# Altium PCB Effects_PSU.PcbDoc
Units mm, origin at the board's own origin, x right, y up, seen from the top; angles counter-clockwise.
Board outline 54.55 x 87.45 mm, 2 copper layers (Top Layer, Bottom Layer); 21 components, 7 nets, 48 pads, 0 vias.
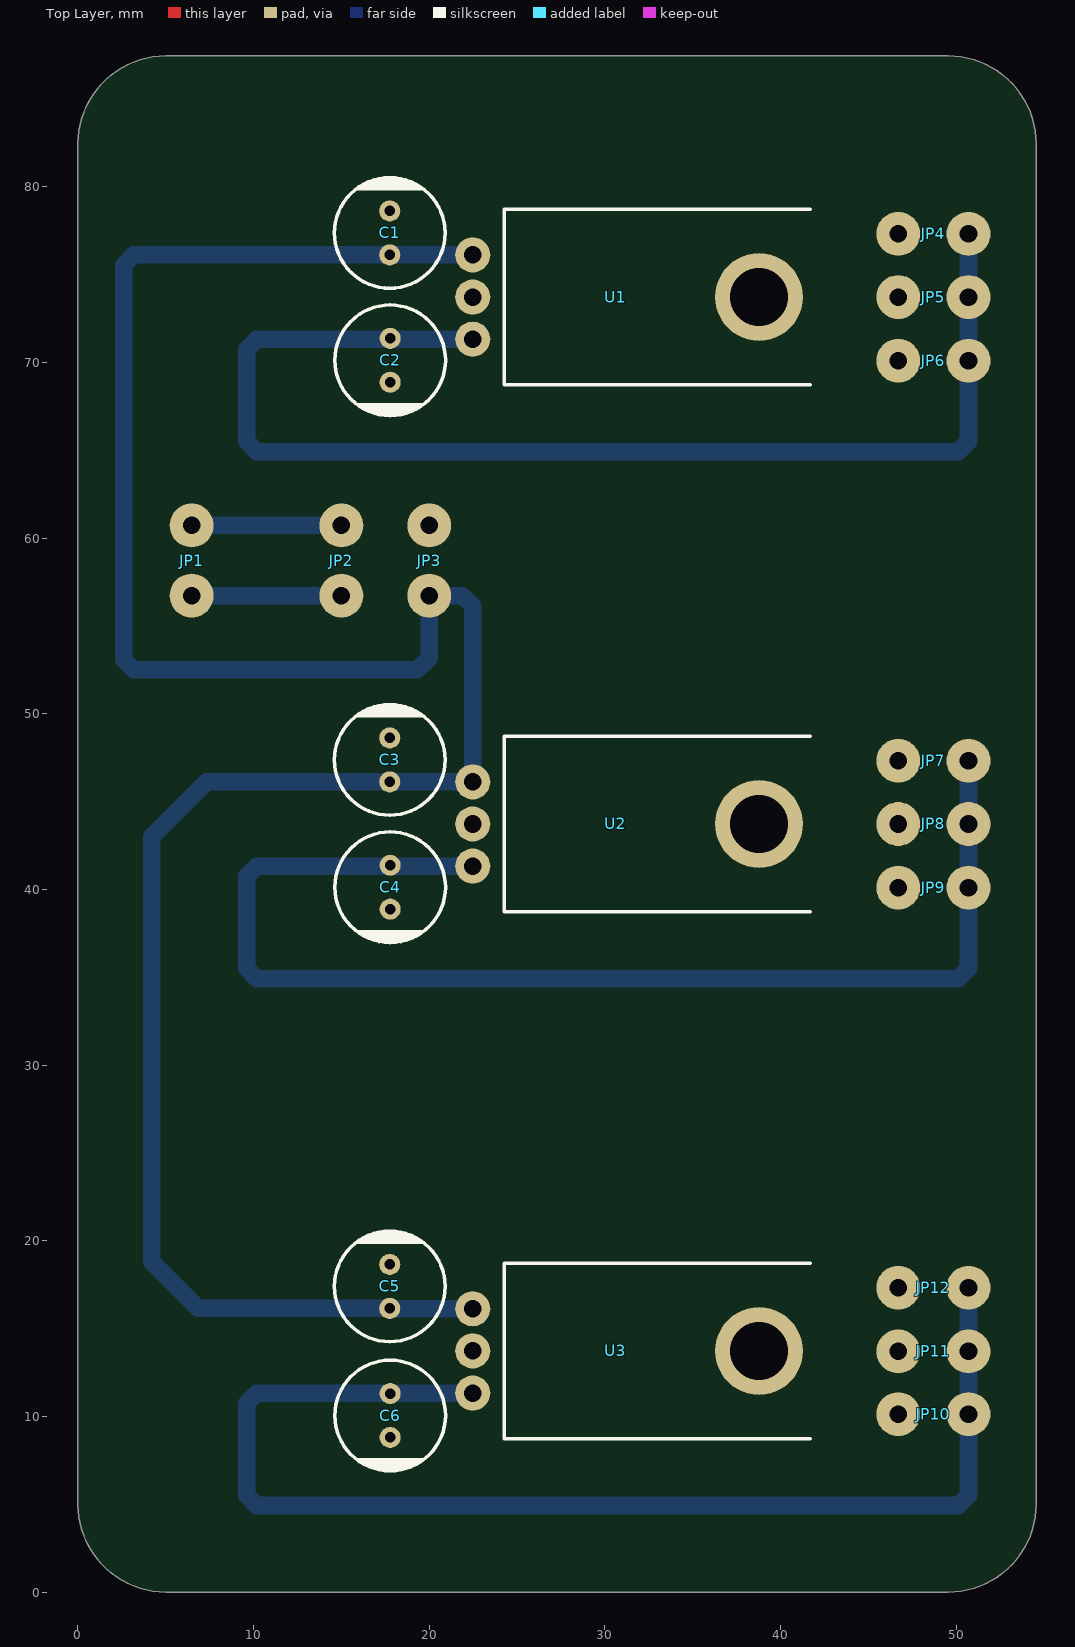
[diagram p0: Top Layer view]
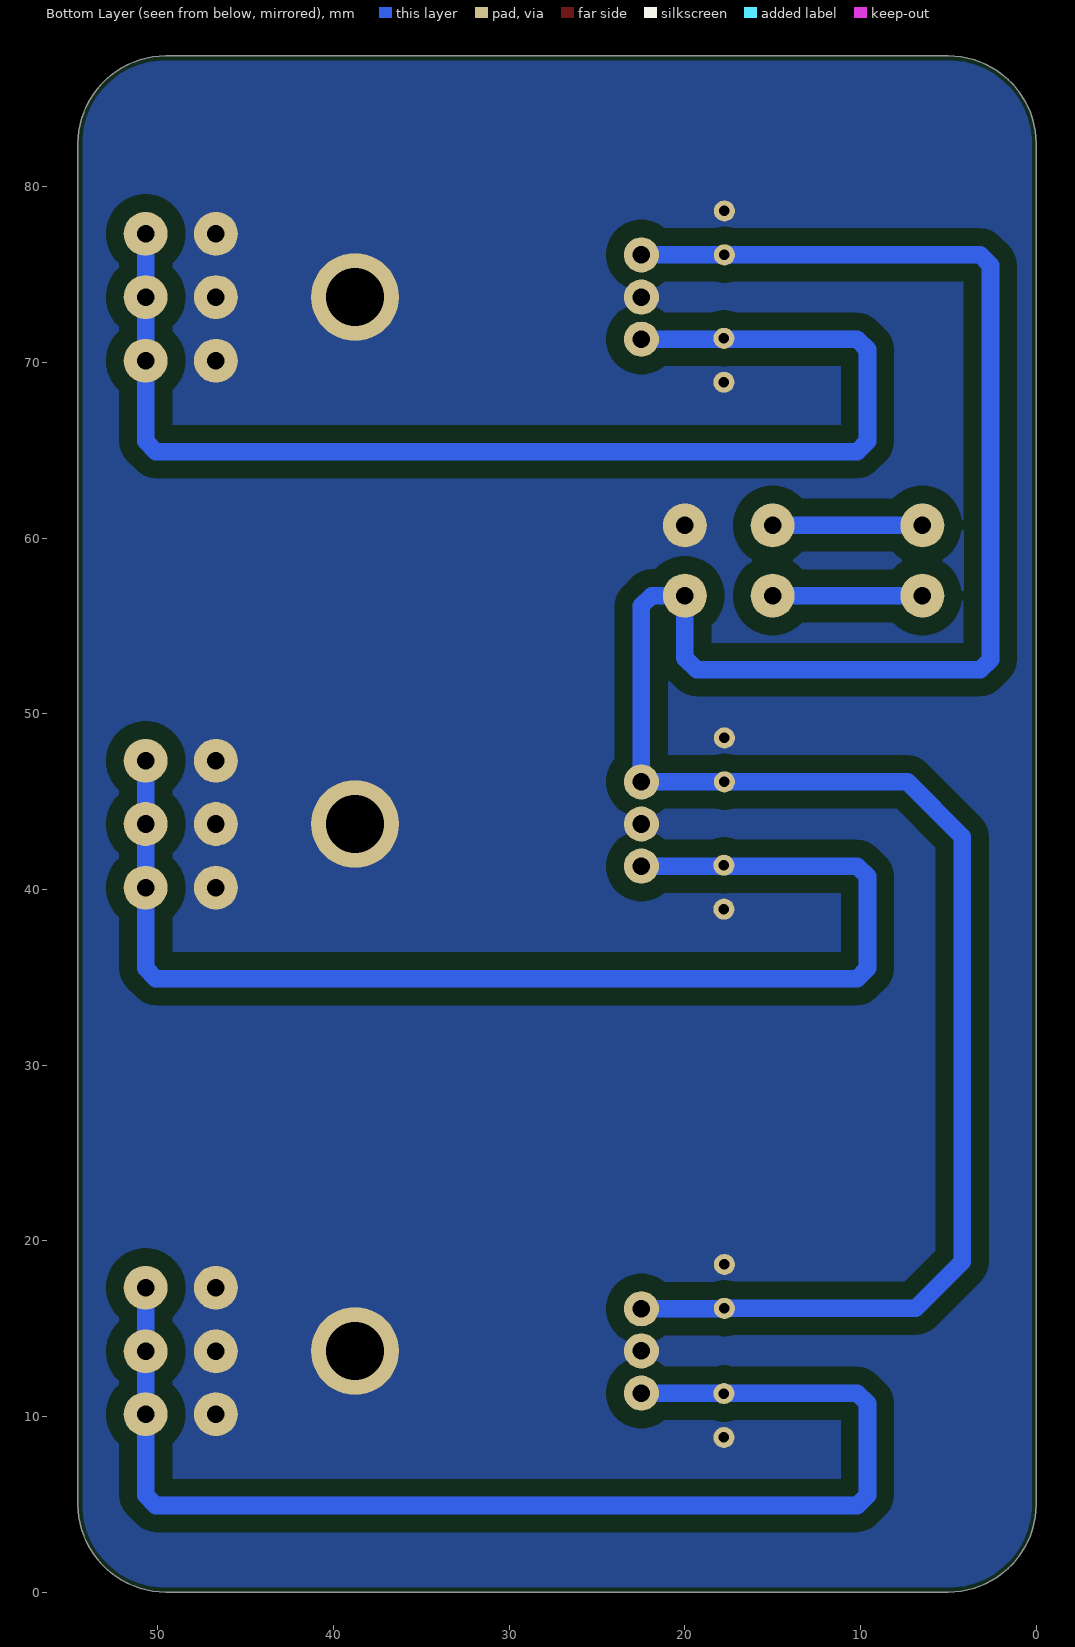
[diagram p1: Bottom Layer view, seen from below]

## Layer stack, top to bottom
Top Solder: solder mask 0.0102, Solder Resist, Dk 3.5
Top Layer: signal copper 0.0356
Dielectric 1: dielectric 0.32, FR-4, Dk 4.8
Bottom Layer: signal copper 0.0356
Bottom Solder: solder mask 0.0102, Solder Resist, Dk 3.5

## Board outline
5,0 cw(c5,5) 0,5 0,82.45 cw(c5,82.45) 5,87.45 49.55,87.45 cw(c49.55,82.45) 54.55,82.45 54.55,5 cw(c49.55,5) 49.55,0

## Design rules (kind name [scope] priority, off if disabled: settings)
BoardOutlineClearance [All] p1: gap=0.254 ignorepadtopadclearanceinfootprint=FALSE
Clearance [All] p1: gap=0.254 ignorepadtopadclearanceinfootprint=FALSE except(0: Arc-Hole Track-Hole SMDPad-Hole THPad-Hole Via-Hole Fill-Hole Poly-Hole Region-Hole Text-Hole; 1: Arc-Fill Arc-Poly Arc-Region Track-Fill Track-Poly Track-Region SMDPad-Fill SMDPad-Poly SMDPad-Region THPad-Fill THPad-Poly THPad-Region Via-Fill Via-Poly Via-Region Fill-Fill Fill-Poly Fill-Region Poly-Poly Poly-Region Region-Region)
ComponentClearance [All] p1: gap=0.15 collisioncheckmode=3 verticalgap=0.254 showdistances=FALSE
HoleSize [All] p1: absolutevalues=TRUE maxlimit=10 minlimit=0.025 maxpercent=80.000 minpercent=20.000
HoleToHoleClearance [All] p1: gap=0.15 allowstackedmicrovias=TRUE
MinimumSolderMaskSliver [All] p1: minsoldermaskwidth=0.15
PolygonConnect [All] p1: connectstyle=Direct reliefconductorwidth=0.254 reliefentries=4 polygonreliefangle="90 Angle" airgapwidth=0.254
RoutingVias [All] p1: holewidth=0.711 width=1.27 viastyle="Through Hole" minholewidth=0.711 minwidth=1.27 maxholewidth=0.711 maxwidth=1.27
SilkToSilkClearance [All] p1: silktosilkclearance=0.15
SilkToSolderMaskClearance [IsPad] p1: minsilkscreentomaskgap=0.15 clearancetoexposedcopper=TRUE
SolderMaskExpansion [All] p1: expansion=0.102 istentingtop=FALSE
Width [All] p1: maxlimit=1 minlimit=0.5 preferedwidth=1
24 further rules are at their usual default settings.

## Components (designator, comment, footprint, x,y, rotation, side; value= is the part's Value field where it differs from the comment)
C1 "100u 16V" "Capacitor 6.3mm" 17.75,77.375 r90 top
C2 "100u 16V" "Capacitor 6.3mm" 17.775,70.125 r270 top
C3 "100u 16V" "Capacitor 6.3mm" 17.75,47.375 r90 top
C4 "100u 16V" "Capacitor 6.3mm" 17.775,40.125 r270 top
C5 "100u 16V" "Capacitor 6.3mm" 17.75,17.4 r90 top
C6 "100u 16V" "Capacitor 6.3mm" 17.775,10.05 r270 top
JP1 "Mechanical 2pin 1mm" "2 PIN" 6.475,58.725 r90 top
JP2 "Mechanical 2pin 1mm" "2 PIN" 15,58.725 r90 top
JP3 "Mechanical 2pin 1mm" "2 PIN" 20,58.725 r90 top
JP4 "Mechanical 2pin 1mm" "2 PIN" 48.7,77.325 r0 top
JP5 "Mechanical 2pin 1mm" "2 PIN" 48.7,73.725 r180 top
JP6 "Mechanical 2pin 1mm" "2 PIN" 48.7,70.1 r180 top
JP7 "Mechanical 2pin 1mm" "2 PIN" 48.7,47.325 r0 top
JP8 "Mechanical 2pin 1mm" "2 PIN" 48.7,43.725 r180 top
JP9 "Mechanical 2pin 1mm" "2 PIN" 48.7,40.1 r180 top
JP10 "Mechanical 2pin 1mm" "2 PIN" 48.7,10.125 r0 top
JP11 "Mechanical 2pin 1mm" "2 PIN" 48.7,13.7 r180 top
JP12 "Mechanical 2pin 1mm" "2 PIN" 48.7,17.325 r180 top
U1 "7809" 78xx 22.275,73.725 r270 top
U2 "7809" 78xx 22.275,43.725 r270 top
U3 "7809" 78xx 22.275,13.725 r270 top

## Footprints (in the part's own frame and the unit in brackets; to place one, negate y for a bottom-side part, rotate by r counter-clockwise, add the part's x,y. Pads: shape width x height; smd on the part's side, far side on the other; paste and mask are expansions set on the pad)
"2 PIN" [mm]
  round 2.5 hole 1 unplated: 1(-2,0) 2(2,0)
78xx [mm]
  round 2 hole 1 unplated: 1(-2.4,0.2) 2(0,0.2) 3(2.4,0.2)
  round 5 hole 3.3 unplated: 2(0,16.5)
  silkscreen extent -5,2 5,19.43, body extent -5.08,0 5.08,19.49, height 4.5
"Capacitor 6.3mm" [mm]
  round 1.2 hole 0.6 unplated: 1(-1.25,0) 2(1.25,0)
  silkscreen extent -3.15,-3.15 3.15,3.15, body extent -3.18,-3.18 3.18,3.18, height 11.53

## Part data
C1 C2 C3 C4 C5 C6: library part "Capacitor 100u 16V 6.3mm"
U1 U2 U3: library part "IC 7809 TO-220"

## Nets (pads, with @x,y where several pads share a name; then routed paths per layer and width w, separated by ;. In a path a pad name is that pad's centre, name@x,y a point inside that pad or via, vN(x,y) a via of type N, cw(c..) or ccw(c..) an arc to the next point about the centre after c; other vN are vias at no path point)
GND: C1.2 C2.2 C3.2 C4.2 C5.2 C6.2 JP3.2 JP4.1 JP5.2 JP6.2 JP7.1 JP8.2 JP9.2 JP10.1 JP11.2 JP12.2 U1.2 U2.2 U3.2
NetC1_1: C1.1 C3.1 C5.1 JP3.1 U1.1 U2.1 U3.1 | length 139.9
  Bottom Layer w1: U3.1 22.462,16.138 17.762,16.138 C5.1 6.85,16.15 4.2,18.8 4.2,43 7.325,46.125 C3.1 U2.1 22.475,56.139 21.889,56.725 JP3.1 20,53.175 19.325,52.5 3.186,52.5 2.6,53.086 2.6,75.539 3.186,76.125 U1.1
NetC2_1: C2.1 JP4.2 JP5.1 JP6.1 U1.3 | length 71.7
  Bottom Layer w1: U1.3 17.775,71.325 10.186,71.325 9.6,70.739 9.6,65.511 10.186,64.925 50.114,64.925 50.7,65.511 50.7,73.7 JP4.2
NetC4_1: C4.1 JP7.2 JP8.1 JP9.1 U2.3 | length 71.7
  Bottom Layer w1: U2.3 10.186,41.325 9.6,40.739 9.6,35.511 10.186,34.925 50.114,34.925 50.7,35.511 JP9.1 JP8.1@50.7,43.7 ; JP8.1 JP7.2
NetC6_1: C6.1 JP10.2 JP11.1 JP12.1 U3.3 | length 71.7
  Bottom Layer w1: U3.3 17.775,11.325 10.186,11.325 9.6,10.739 9.6,5.511 10.186,4.925 50.114,4.925 50.7,5.511 JP11.1 JP12.1
NetJP1_1: JP1.1 JP2.1 | length 8.5
  Bottom Layer w1: JP1.1 JP2.1
NetJP1_2: JP1.2 JP2.2 | length 8.5
  Bottom Layer w1: JP1.2 JP2.2

## Polygon pours and split planes (outlines as drawn)
GND on Bottom Layer "GND_L02_P000" (solid, pour order 0): 0,0 55,0 55,87.5 0,87.5

## Silkscreen, mask and mechanical layers (free items; w line width, h text height)
Outline:
  the board outline again, w0.1